# Altium PCB PCB1.PcbDoc (part 1 of 2)
Units mil, origin at the board's own origin, x right, y up, seen from the top; angles counter-clockwise.
Board outline 6000 x 4000 mil, 2 copper layers (Top Layer, Bottom Layer); 116 components, 72 nets, 335 pads, 101 vias.
Unrouted connection lines stored in the file: 3.
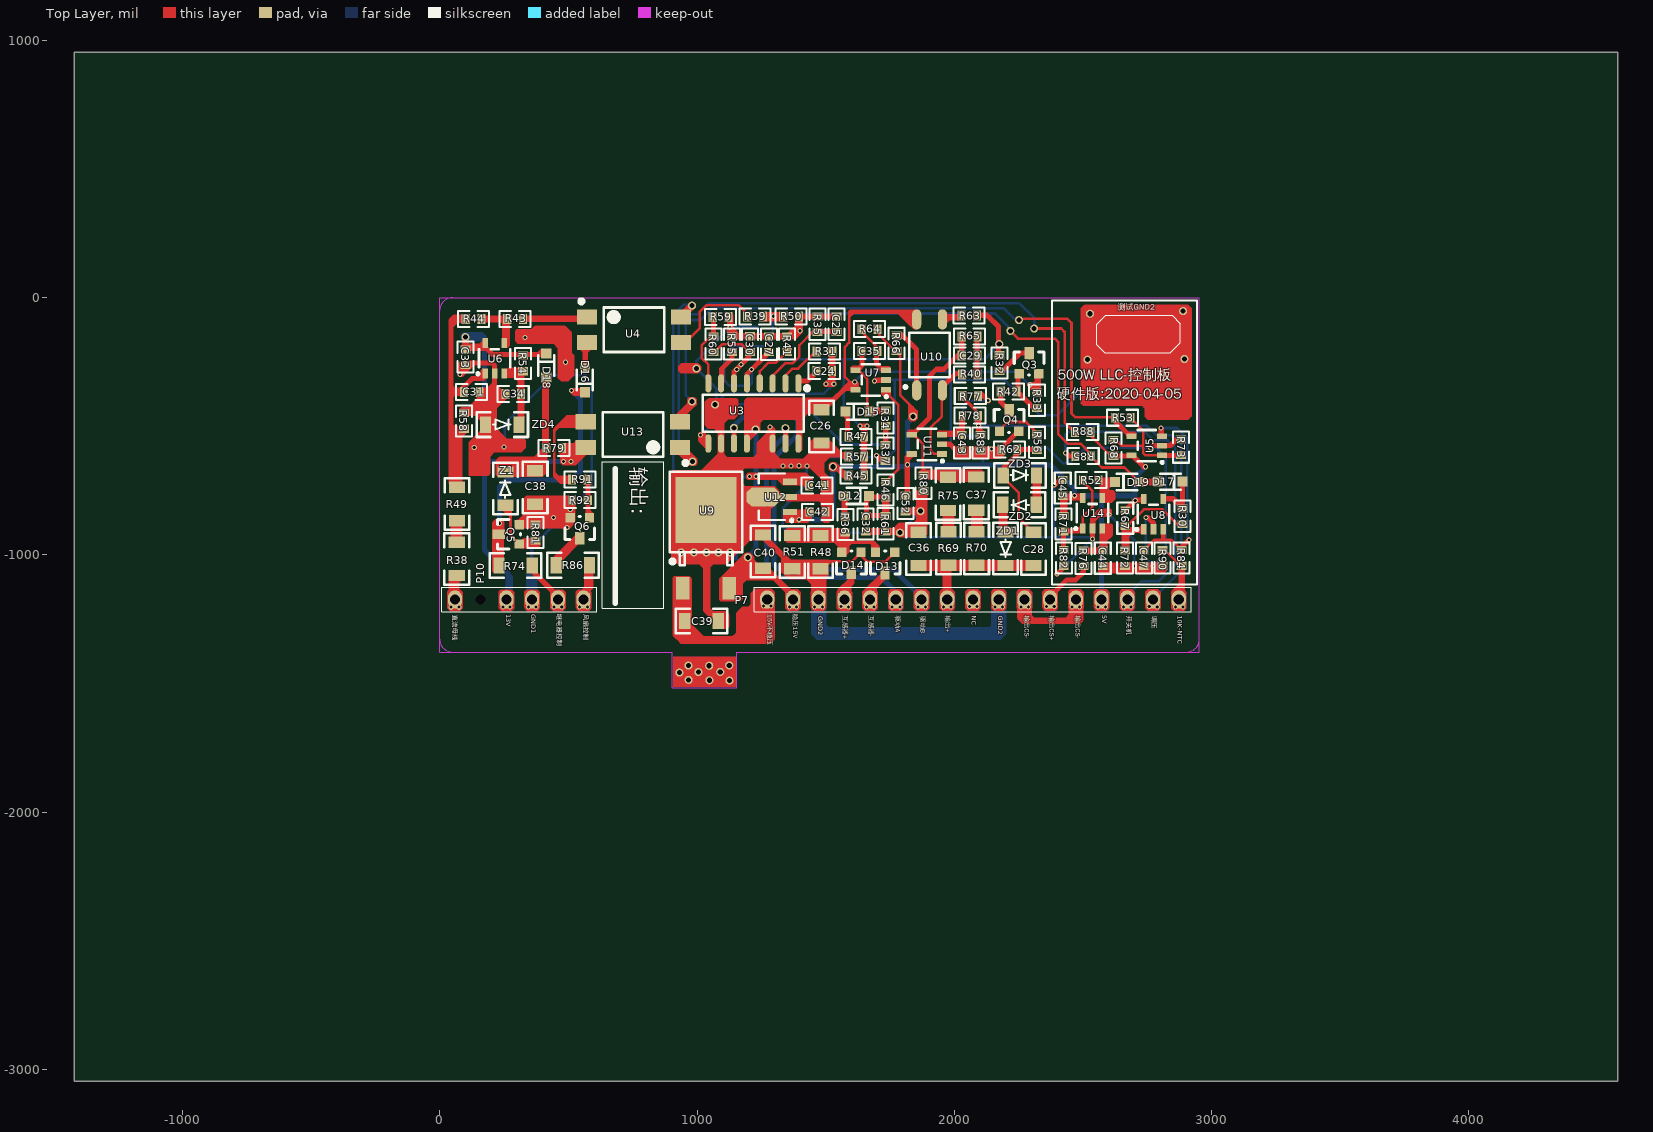
[diagram p0: Top Layer view]
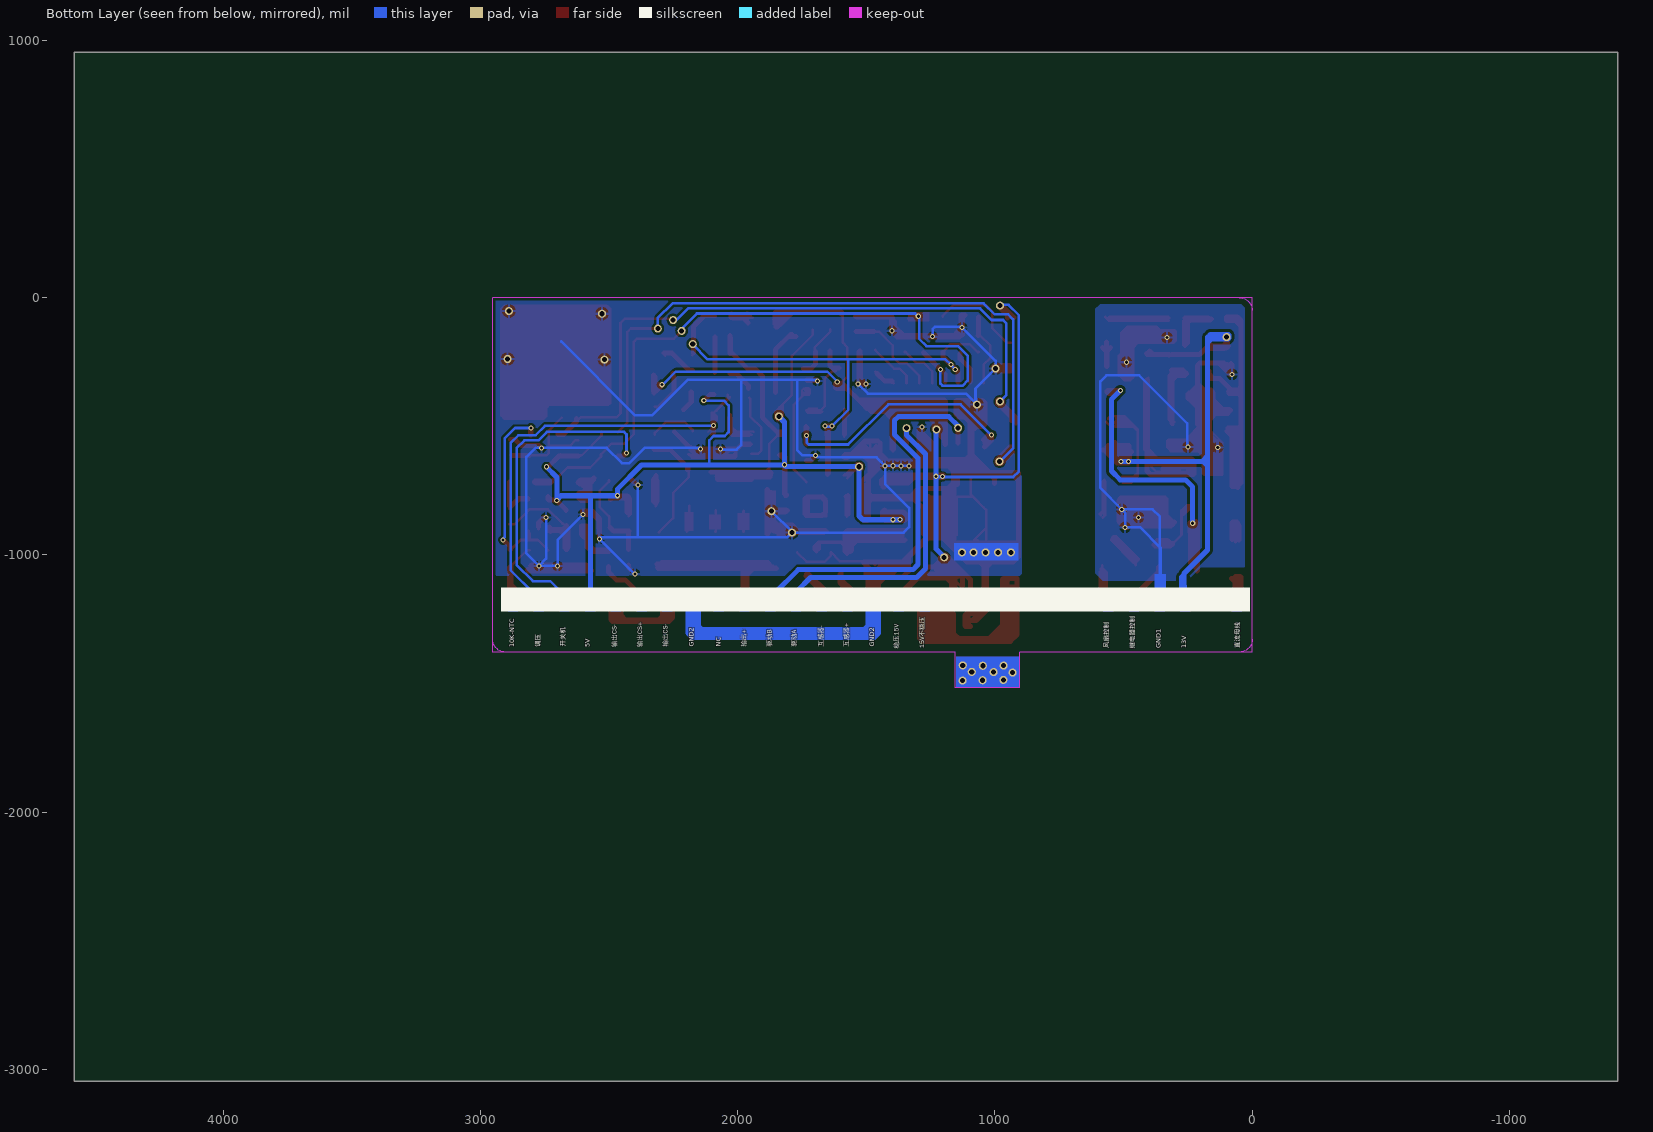
[diagram p1: Bottom Layer view, seen from below]

## Layer stack, top to bottom
Top Layer: signal copper 1.4
Dielectric: dielectric 12.6, FR-4, Dk 4.8
Bottom Layer: signal copper 1.4

## Board outline
-1420.79,-3046.26 4579.21,-3046.26 4579.21,953.74 -1420.79,953.74

## Design rules (kind name [scope] priority, off if disabled: settings)
Clearance [All] p1: gap=10
PolygonConnect [All] p1: connectstyle=Relief reliefconductorwidth=10 reliefentries=4 polygonreliefangle="90 Angle"
RoomDefinition Sheet1 [InComponentClass('Sheet1')] p1: confinementstyle=ConfineIn formatcopy=TRUE lockcomponents=FALSE outline -2420.79,-4046.26 -420.79,-4046.26 -420.79,-3046.26 -2420.79,-3046.26
RoutingVias [All] p1: holewidth=28 width=50 viastyle="Through Hole" minholewidth=28 minwidth=50 maxholewidth=28 maxwidth=50
SilkscreenOverComponentPads [All] p1: minsilkscreentomaskgap=10
SolderMaskExpansion [All] p1: expansion=4
Width [All] p1: maxlimit=10 minlimit=10 preferedwidth=10
27 further rules are at their usual default settings.

## Components (designator, comment, footprint, x,y, rotation, side; value= is the part's Value field where it differs from the comment)
C24 "105/50V/0603" 0603 1494.68,-285.83 r180 top
C25 "105/50V/0603" 0603 1541.54,-103.54 r270 top
C26 "475/50V/1206" 1206 1484.25,-500.39 r270 top
C27 "105/50V/0603" 0603 1279.13,-181.3 r270 top
C28 "223/500V/1206" 1206 2307.87,-976.57 r90 top
C29 "472/50V/0603" 0603 2059.65,-225.2 r0 top
C30 "471/50V/0603" 0603 1206.69,-180.51 r270 top
C31 "104/50V/0603" 0603 124.02,-366.34 r0 top
C32 "104/50V/0603" 0603 1655.91,-879.33 r90 top
C33 "104/50V/0603" 0603 100.79,-231.3 r270 top
C34 "104/50V/0603" 0603 285.43,-374.21 r0 top
C35 "105/50V/0603" 0603 1670.28,-208.27 r180 top
C36 "224 250V/1206" 1206 1861.42,-976.57 r90 top
C37 "NC/1206" 1206 2085.43,-762.01 r90 top
C38 "226/25V/1206" 1206 370.67,-738.19 r270 top
C39 "475/50V/1206" 1206 1017.32,-1257.48 r0 top
C40 "475/50V/1206" 1206 1256.69,-987.6 r90 top
C41 "225/25V/0603" 0603 1465.75,-729.72 r180 top
C42 "225/25V/0603" 0603 1468.5,-832.48 r180 top
C43 "104/50V/0603" 0603 2029.33,-564.57 r90 top
C44 "105/50V/0603" 0603 2577.36,-1012.99 r90 top
C45 "104/50V/0603" 0603 2421.85,-739.76 r270 top
C47 "104/50V/0603" 0603 2736.81,-1012.2 r90 top
C52 "104/50V/0603" 0603 1810.43,-800.39 r90 top
D12 "1N4148WS" 4148/323 1620.67,-770.87 r180 top
D13 "BAV99" SOT-23/BAV99 1731.5,-1030.12 r90 top
D14 "BAV99" SOT-23/BAV99 1600.39,-1029.72 r90 top
D15 "1N4148WS" 4148/323 1623.82,-443.31 r0 top
D16 "1N4148WS" 4148/323 563.98,-320.47 r90 top
D17 "1N4148WS" 4148/323 2840.35,-715.35 r180 top
D18 "1N4148WS" 4148/323 413.98,-263.78 r270 top
D19 "1N4148WS" 4148/323 2671.85,-716.93 r0 top
P7 "2.54*17" 控制主板次级排针 2072.83,-1173.03 r0 top
P10 "2.54*6" 控制主板-初级 309.06,-1173.23 r0 top
Q3 "BLM3401" SOT-23/PMOS 2291.34,-261.81 r0 top
Q4 "2N7002K" SOT-23/MOS 2213.78,-484.84 r0 top
Q5 "CJ3404" SOT-23/MOS 275,-919.29 r90 top
Q6 "CJ3404" SOT-23/MOS 543.7,-889.96 r180 top
R30 "6.8K/0603" 0603 2887.6,-850 r270 top
R31 "2.7K/0603" 0603 1495.47,-209.06 r0 top
R32 "1K/0603" 0603 2176.57,-254.33 r90 top
R33 "10K/0603" 0603 2322.24,-398.82 r270 top
R34 "2K/0603" 0603 1733.66,-468.5 r90 top
R35 "1M/0603" 0603 1468.7,-103.54 r90 top
R36 "100R/0603" 0603 1576.38,-882.09 r90 top
R37 "2K/0603" 0603 1733.27,-603.94 r270 top
R38 "150K/1206" 1206 66.14,-1015.35 r90 top
R39 "10K/0603" 0603 1225.79,-74.02 r180 top
R40 "10K/0603" 0603 2060.04,-298.03 r0 top
R41 "12K/0603" 0603 1350.39,-180.91 r90 top
R42 "10K/0603" 0603 2211.02,-364.76 r180 top
R43 "2K/0603" 0603 292.72,-82.28 r0 top
R44 "750K/0603" 0603 131.3,-82.28 r0 top
R45 "5.1K/0603" 0603 1618.7,-692.13 r0 top
R46 "2K/0603" 0603 1733.66,-747.24 r90 top
R47 "2K/0603" 0603 1618.7,-540.95 r0 top
R48 "100R 1%/1206" 1206 1479.92,-989.57 r270 top
R49 "200K/1206" 1206 66.54,-802.36 r90 top
R50 "1K/0603" 0603 1365.55,-74.02 r180 top
R51 "100R 1%/1206" 1206 1370.47,-989.57 r270 top
R52 "30K/0603" 0603 2530.91,-709.84 r180 top
R53 "6.8K/0603" 0603 2654.53,-466.93 r180 top
R54 "2K/0603" 0603 324.02,-255.71 r270 top
R55 "22K/0603" 0603 1135.43,-180.91 r90 top
R56 "2K/0603" 0603 2322.44,-562.4 r90 top
R57 "1K/0603" 0603 1619.49,-616.93 r180 top
R58 "9.1K/0603" 0603 93.7,-479.33 r270 top
R59 "10K/0603" 0603 1091.54,-75.2 r180 top
R60 "39K/0603" 0603 1063.39,-180.91 r270 top
R61 "10K/0603" 0603 1733.46,-878.94 r270 top
R62 "100K/0603" 0603 2214.17,-589.96 r180 top
R63 "1.5K/0603" 0603 2058.07,-70.08 r0 top
R64 "2K/0603" 0603 1670.67,-122.83 r180 top
R65 "300K/0603" 0603 2059.65,-151.18 r0 top
R66 "220R/0603" 0603 1775.79,-177.56 r270 top
R67 "1.5K/0603" 0603 2664.76,-857.48 r270 top
R68 "1.2K/0603" 0603 2619.88,-584.25 r90 top
R69 "9.1K/1206" 1206 1977.56,-975.39 r90 top
R70 "NC/1206" 1206 2087.01,-975 r90 top
R71 "10K/0603" 0603 2424.21,-879.53 r270 top
R72 "3.9K/0603" 0603 2663.58,-1012.6 r270 top
R73 "1K/0603" 0603 2882.09,-581.5 r90 top
R74 "1R/1206" 1206 295.08,-1041.34 r180 top
R75 "12K/1206" 1206 1975.98,-762.8 r90 top
R76 "3.3K/0603" 0603 2502.17,-1013.39 r270 top
R77 "2K/0603" 0603 2062.4,-381.89 r180 top
R78 "10K/0603" 0603 2061.22,-459.06 r180 top
R79 "100K/0603" 0603 444.29,-584.65 r180 top
R80 "3K/0603" 0603 1880.12,-721.65 r270 top
R81 "100K/0603" 0603 372.64,-913.39 r90 top
R82 "100R/0603" 0603 2425.79,-1011.81 r270 top
R83 "3K/0603" 0603 2102.56,-564.57 r90 top
R84 "3.3K/0603" 0603 2883.66,-1011.81 r270 top
R85 "1K/0603" 0603 2501.38,-616.54 r0 top
R86 "1R/1206" 1206 517.32,-1040.35 r180 top
R88 "1K/0603" 0603 2499.41,-522.05 r0 top
R90 "3.3K/0603" 0603 2809.65,-1011.81 r270 top
R91 "10K/0603" 0603 544.49,-707.28 r0 top
R92 "10K/0603" 0603 544.88,-787.6 r180 top
U3 "NCP1396A" SOP16 1218.9,-450.2 r180 top
U4 "EL817S1(A)(TU)-F" EL817A 754.33,-141.54 r180 top
U5 "LM321-TR" SOT23-5 2748.23,-575.59 r90 top
U6 "LM321-TR" SOT23-5 213.39,-235.83 r0 top
U7 "LM321-TR" SOT23-5 1675.79,-320.08 r90 top
U8 "LM321-TR" SOT23-5 2774.61,-841.34 r0 top
U9 "CJ7815_C139827" to-252 1034.65,-977.56 r270 top
U10 "EL357N(A)(TA)-G" EL357 1904.13,-222.44 r90 top
U11 "GS8051-TR" SOT23-5 1893.9,-570.47 r90 top
U12 "CJ78L05" CJ78J05 1278.74,-775 r0 top
U13 "EL817S1(A)(TU)-F" EL817A 751.57,-515.95 r0 top
U14 "LM321-TR" SOT23-5 2537.6,-837.8 r0 top
Z1 "5.1V" SOD-123 255.31,-742.13 r90 top
ZD1 "5.1V" SOD-123 2198.82,-975.79 r270 top
ZD2 "11V" SOD-123 2253.74,-805.12 r180 top
ZD3 "11V" SOD-123 2255.31,-691.34 r0 top
ZD4 "5.1V" SOD-123 242.91,-493.9 r0 top

## Footprints (in the part's own frame and the unit in brackets; to place one, negate y for a bottom-side part, rotate by r counter-clockwise, add the part's x,y. Pads: shape width x height; smd on the part's side, far side on the other; paste and mask are expansions set on the pad)
0603 [mm]
  rect 0.8x0.98 smd: 1(0.77,0) 2(-0.77,0)
  silkscreen extent -1.53,-0.79 1.54,0.79
1206 [mil]
  rect 44x63 smd: 1(-65,0) 2(65,0)
  silkscreen extent -100,-48 100,48
4148/323 [mm]
  rect 1x1 smd: 1(-1.2,0) 2(1.2,0)
  silkscreen extent -1,-0.8 1,0.8
CJ78J05 [mm]
  rect 1.4x0.6 smd: 1(2.116,-1.495) 3(2.116,1.505)
  oct 3.2x1.9 smd: 2(-0.584,0.005)
  rect 1.8x0.6 smd: 2(1.916,0.005)
  silkscreen extent -0.98,-2.47 2.39,2.3
EL357 [mm]
  oval 2x0.9 smd: 1(-3.5,1.27) 2(-3.5,-1.27) 3(3.5,-1.27) 4(3.5,1.27)
  silkscreen extent -3.32,-2 2.2,2.54
EL817A [mm]
  rect 2x1.5 smd: 1(4.633,-1.693) 2(4.633,0.847) 3(-4.667,0.847) 4(-4.667,-1.693)
  silkscreen extent -3.02,-3.42 5.38,1.78
SOD-123 [mm]
  rect 1.1x1.6 smd: 1(-1.65,0) 2(1.65,0)
  silkscreen extent -2.54,-1.22 2.54,1.22
SOP16 [mil]
  oval 23.62x70.79 smd: 1(-175,-117) 2(-125,-117) 3(-75,-117) 4(-25,-117) 5(25,-117) 6(75,-117) 7(125,-117) 8(175,-117) 9(175,117) 10(125,117) 11(75,117) 12(25,117) 14(-75,117) 15(-125,117) 16(-175,117)
  silkscreen extent -217,-106 196,72
SOT23-5 [mm]
  rect 0.55x1 smd: 1(-0.95,-1.5) 2(0,-1.5) 3(0.95,-1.5) 4(0.95,1.5) 5(-0.95,1.5)
  silkscreen extent -1.78,-1.65 1.55,0.9
SOT-23/BAV99 [mil]
  rect 36x36 smd: 1(40,-37.5) 2(40,37.5)
  rect 50x36 smd: 3(-40,0.5)
  silkscreen extent -45,-57 45,58
SOT-23/MOS [mil]
  rect 36x50 smd: D(-0.19,45.63)
  rect 36x36 smd: G(-38.19,-34.37) S(36.81,-34.37)
  silkscreen extent -58,-39 57,51
SOT-23/PMOS [mil]
  rect 36x50 smd: 1(-0.19,45.63)
  rect 36x36 smd: 2(-38.19,-34.37) 3(36.81,-34.37)
  silkscreen extent -58,-39 57,51
to-252 [mm]
  rect 2.2x1.35 smd: 1(3.876,-2.29) 3(3.871,2.29)
  rect 6.5x6 smd: 4(-3.876,0)
  silkscreen extent -7.64,-3.57 1.61,3.57
控制主板-初级 [mm]
  oval 1.4x1.8 hole 1: 1(-6.35,0) 3(-1.27,0) 4(1.27,0) 5(3.81,0) 6(6.35,0)
  round 0 hole 1: 2(-3.81,0)
  Top Layer lines w0.5: -6.87,-0.55 -6.87,-0.8 -6.75,-0.92 -5.93,-0.92 -5.82,-0.81 -5.82,0.63 -5.94,0.75 -6.81,0.75 -6.88,0.68 -6.88,-0.71 -6.75,-0.84 -6.31,-0.84 -6.19,-0.72 -6.24,-0.72 -6.15,-0.63 -6.15,-0.28 ; -1.79,-0.55 -1.79,-0.8 -1.67,-0.92 -0.85,-0.92 -0.74,-0.81 -0.74,0.63 -0.86,0.75 -1.73,0.75 -1.8,0.68 -1.8,-0.71 -1.67,-0.84 -1.23,-0.84 -1.11,-0.72 -1.16,-0.72 -1.07,-0.63 -1.07,-0.28 ; 0.75,-0.55 0.75,-0.8 0.87,-0.92 1.69,-0.92 1.8,-0.81 1.8,0.63 1.68,0.75 0.81,0.75 0.74,0.68 0.74,-0.71 0.87,-0.84 1.31,-0.84 1.43,-0.72 1.38,-0.72 1.47,-0.63 1.47,-0.28 ; 3.29,-0.55 3.29,-0.8 3.41,-0.92 4.23,-0.92 4.34,-0.81 4.34,0.63 4.22,0.75 3.35,0.75 3.28,0.68 3.28,-0.71 3.41,-0.84 3.85,-0.84 3.97,-0.72 3.92,-0.72 4.01,-0.63 4.01,-0.28 ; 5.83,-0.55 5.83,-0.8 5.95,-0.92 6.77,-0.92 6.88,-0.81 6.88,0.63 6.76,0.75 5.89,0.75 5.82,0.68 5.82,-0.71 5.95,-0.84 6.39,-0.84 6.51,-0.72 6.46,-0.72 6.55,-0.63 6.55,-0.28
  Bottom Layer lines w0.5: -6.86,-0.56 -6.86,-0.81 -6.74,-0.93 -5.92,-0.93 -5.81,-0.82 -5.81,0.62 -5.93,0.74 -6.8,0.74 -6.87,0.67 -6.87,-0.72 -6.74,-0.85 -6.3,-0.85 -6.18,-0.73 -6.23,-0.73 -6.14,-0.64 -6.14,-0.29 ; -1.78,-0.56 -1.78,-0.81 -1.66,-0.93 -0.84,-0.93 -0.73,-0.82 -0.73,0.62 -0.85,0.74 -1.72,0.74 -1.79,0.67 -1.79,-0.72 -1.66,-0.85 -1.22,-0.85 -1.1,-0.73 -1.15,-0.73 -1.06,-0.64 -1.06,-0.29 ; 0.76,-0.56 0.76,-0.81 0.88,-0.93 1.7,-0.93 1.81,-0.82 1.81,0.62 1.69,0.74 0.82,0.74 0.75,0.67 0.75,-0.72 0.88,-0.85 1.32,-0.85 1.44,-0.73 1.39,-0.73 1.48,-0.64 1.48,-0.29 ; 3.3,-0.56 3.3,-0.81 3.42,-0.93 4.24,-0.93 4.35,-0.82 4.35,0.62 4.23,0.74 3.36,0.74 3.29,0.67 3.29,-0.72 3.42,-0.85 3.86,-0.85 3.98,-0.73 3.93,-0.73 4.02,-0.64 4.02,-0.29 ; 5.84,-0.56 5.84,-0.81 5.96,-0.93 6.78,-0.93 6.89,-0.82 6.89,0.62 6.77,0.74 5.9,0.74 5.83,0.67 5.83,-0.72 5.96,-0.85 6.4,-0.85 6.52,-0.73 6.47,-0.73 6.56,-0.64 6.56,-0.29
  silkscreen extent -7.65,-1.2 7.65,1.2
控制主板次级排针 [mm]
  oval 1.4x1.8 hole 1: 11(-20.32,0) 12(-17.78,0) 13(-15.24,0) 14(-12.7,0) 15(-10.16,0) 16(-7.62,0) 17(-5.08,0) 18(-2.54,0) 19(0,0) 20(2.54,0) 21(5.08,0) 22(7.62,0) 23(10.16,0) 24(12.7,0) 25(15.24,0) 26(17.78,0) 27(20.32,0)
  Top Layer lines w0.5: -20.84,-0.55 -20.84,-0.8 -20.72,-0.92 -19.9,-0.92 -19.79,-0.81 -19.79,0.63 -19.91,0.75 -20.78,0.75 -20.85,0.68 -20.85,-0.71 -20.72,-0.84 -20.28,-0.84 -20.16,-0.72 -20.21,-0.72 -20.12,-0.63 -20.12,-0.28 ; -18.3,-0.55 -18.3,-0.8 -18.18,-0.92 -17.36,-0.92 -17.25,-0.81 -17.25,0.63 -17.37,0.75 -18.24,0.75 -18.31,0.68 -18.31,-0.71 -18.18,-0.84 -17.74,-0.84 -17.62,-0.72 -17.67,-0.72 -17.58,-0.63 -17.58,-0.28 ; -15.76,-0.55 -15.76,-0.8 -15.64,-0.92 -14.82,-0.92 -14.71,-0.81 -14.71,0.63 -14.83,0.75 -15.7,0.75 -15.77,0.68 -15.77,-0.71 -15.64,-0.84 -15.2,-0.84 -15.08,-0.72 -15.13,-0.72 -15.04,-0.63 -15.04,-0.28 ; -13.22,-0.55 -13.22,-0.8 -13.1,-0.92 -12.28,-0.92 -12.17,-0.81 -12.17,0.63 -12.29,0.75 -13.16,0.75 -13.23,0.68 -13.23,-0.71 -13.1,-0.84 -12.66,-0.84 -12.54,-0.72 -12.59,-0.72 -12.5,-0.63 -12.5,-0.28 ; -10.68,-0.55 -10.68,-0.8 -10.56,-0.92 -9.74,-0.92 -9.63,-0.81 -9.63,0.63 -9.75,0.75 -10.62,0.75 -10.69,0.68 -10.69,-0.71 -10.56,-0.84 -10.12,-0.84 -10,-0.72 -10.05,-0.72 -9.96,-0.63 -9.96,-0.28 ; -8.14,-0.55 -8.14,-0.8 -8.02,-0.92 -7.2,-0.92 -7.09,-0.81 -7.09,0.63 -7.21,0.75 -8.08,0.75 -8.15,0.68 -8.15,-0.71 -8.02,-0.84 -7.58,-0.84 -7.46,-0.72 -7.51,-0.72 -7.42,-0.63 -7.42,-0.28 ; -5.6,-0.55 -5.6,-0.8 -5.48,-0.92 -4.66,-0.92 -4.55,-0.81 -4.55,0.63 -4.67,0.75 -5.54,0.75 -5.61,0.68 -5.61,-0.71 -5.48,-0.84 -5.04,-0.84 -4.92,-0.72 -4.97,-0.72 -4.88,-0.63 -4.88,-0.28 ; -3.06,-0.55 -3.06,-0.8 -2.94,-0.92 -2.12,-0.92 -2.01,-0.81 -2.01,0.63 -2.13,0.75 -3,0.75 -3.07,0.68 -3.07,-0.71 -2.94,-0.84 -2.5,-0.84 -2.38,-0.72 -2.43,-0.72 -2.34,-0.63 -2.34,-0.28 ; -0.52,-0.55 -0.52,-0.8 -0.4,-0.92 0.42,-0.92 0.53,-0.81 0.53,0.63 0.41,0.75 -0.46,0.75 -0.53,0.68 -0.53,-0.71 -0.4,-0.84 0.04,-0.84 0.16,-0.72 0.11,-0.72 0.2,-0.63 0.2,-0.28 ; 2.02,-0.55 2.02,-0.8 2.14,-0.92 2.96,-0.92 3.07,-0.81 3.07,0.63 2.95,0.75 2.08,0.75 2.01,0.68 2.01,-0.71 2.14,-0.84 2.58,-0.84 2.7,-0.72 2.65,-0.72 2.74,-0.63 2.74,-0.28 ; 4.56,-0.55 4.56,-0.8 4.68,-0.92 5.5,-0.92 5.61,-0.81 5.61,0.63 5.49,0.75 4.62,0.75 4.55,0.68 4.55,-0.71 4.68,-0.84 5.12,-0.84 5.24,-0.72 5.19,-0.72 5.28,-0.63 5.28,-0.28 ; 7.1,-0.55 7.1,-0.8 7.22,-0.92 8.04,-0.92 8.15,-0.81 8.15,0.63 8.03,0.75 7.16,0.75 7.09,0.68 7.09,-0.71 7.22,-0.84 7.66,-0.84 7.78,-0.72 7.73,-0.72 7.82,-0.63 7.82,-0.28 ; 9.64,-0.55 9.64,-0.8 9.76,-0.92 10.58,-0.92 10.69,-0.81 10.69,0.63 10.57,0.75 9.7,0.75 9.63,0.68 9.63,-0.71 9.76,-0.84 10.2,-0.84 10.32,-0.72 10.27,-0.72 10.36,-0.63 10.36,-0.28 ; 12.18,-0.55 12.18,-0.8 12.3,-0.92 13.12,-0.92 13.23,-0.81 13.23,0.63 13.11,0.75 12.24,0.75 12.17,0.68 12.17,-0.71 12.3,-0.84 12.74,-0.84 12.86,-0.72 12.81,-0.72 12.9,-0.63 12.9,-0.28 ; 17.26,-0.55 17.26,-0.8 17.38,-0.92 18.2,-0.92 18.31,-0.81 18.31,0.63 18.19,0.75 17.32,0.75 17.25,0.68 17.25,-0.71 17.38,-0.84 17.82,-0.84 17.94,-0.72 17.89,-0.72 17.98,-0.63 17.98,-0.28 ; 19.8,-0.55 19.8,-0.8 19.92,-0.92 20.74,-0.92 20.85,-0.81 20.85,0.63 20.73,0.75 19.86,0.75 19.79,0.68 19.79,-0.71 19.92,-0.84 20.36,-0.84 20.48,-0.72 20.43,-0.72 20.52,-0.63 20.52,-0.28 ; 14.71,-0.71 14.71,0.68 ; 14.71,-0.71 14.84,-0.84 ; 14.71,-0.71 14.84,-0.84 ; 14.71,-0.71 14.71,0.68 ; 14.71,0.68 14.78,0.75 ; 14.71,0.68 14.78,0.75 ; 14.72,-0.8 14.72,-0.55 14.72,-0.8 ; 14.72,-0.8 14.84,-0.92 ; 14.72,-0.8 14.84,-0.92 ; 14.78,0.75 15.65,0.75 ; 14.78,0.75 15.65,0.75 ; 14.84,-0.92 15.66,-0.92 ; 14.84,-0.92 15.66,-0.92 ; 14.84,-0.84 15.28,-0.84 ; 14.84,-0.84 15.28,-0.84 ; 15.28,-0.84 15.4,-0.72 ; 15.28,-0.84 15.4,-0.72 ; 15.35,-0.72 15.4,-0.72 ; 15.35,-0.72 15.44,-0.63 ; 15.35,-0.72 15.44,-0.63 ; 15.35,-0.72 15.4,-0.72 ; 15.44,-0.63 15.44,-0.28 15.44,-0.63 ; 15.65,0.75 15.77,0.63 ; 15.65,0.75 15.77,0.63 ; 15.66,-0.92 15.77,-0.81 ; 15.66,-0.92 15.77,-0.81 ; 15.77,-0.81 15.77,0.63 ; 15.77,-0.81 15.77,0.63
  Bottom Layer lines w0.5: -20.83,-0.56 -20.83,-0.81 -20.71,-0.93 -19.89,-0.93 -19.78,-0.82 -19.78,0.62 -19.9,0.74 -20.77,0.74 -20.84,0.67 -20.84,-0.72 -20.71,-0.85 -20.27,-0.85 -20.15,-0.73 -20.2,-0.73 -20.11,-0.64 -20.11,-0.29 ; -18.29,-0.56 -18.29,-0.81 -18.17,-0.93 -17.35,-0.93 -17.24,-0.82 -17.24,0.62 -17.36,0.74 -18.23,0.74 -18.3,0.67 -18.3,-0.72 -18.17,-0.85 -17.73,-0.85 -17.61,-0.73 -17.66,-0.73 -17.57,-0.64 -17.57,-0.29 ; -15.75,-0.56 -15.75,-0.81 -15.63,-0.93 -14.81,-0.93 -14.7,-0.82 -14.7,0.62 -14.82,0.74 -15.69,0.74 -15.76,0.67 -15.76,-0.72 -15.63,-0.85 -15.19,-0.85 -15.07,-0.73 -15.12,-0.73 -15.03,-0.64 -15.03,-0.29 ; -13.21,-0.56 -13.21,-0.81 -13.09,-0.93 -12.27,-0.93 -12.16,-0.82 -12.16,0.62 -12.28,0.74 -13.15,0.74 -13.22,0.67 -13.22,-0.72 -13.09,-0.85 -12.65,-0.85 -12.53,-0.73 -12.58,-0.73 -12.49,-0.64 -12.49,-0.29 ; -10.67,-0.56 -10.67,-0.81 -10.55,-0.93 -9.73,-0.93 -9.62,-0.82 -9.62,0.62 -9.74,0.74 -10.61,0.74 -10.68,0.67 -10.68,-0.72 -10.55,-0.85 -10.11,-0.85 -9.99,-0.73 -10.04,-0.73 -9.95,-0.64 -9.95,-0.29 ; -8.13,-0.56 -8.13,-0.81 -8.01,-0.93 -7.19,-0.93 -7.08,-0.82 -7.08,0.62 -7.2,0.74 -8.07,0.74 -8.14,0.67 -8.14,-0.72 -8.01,-0.85 -7.57,-0.85 -7.45,-0.73 -7.5,-0.73 -7.41,-0.64 -7.41,-0.29 ; -5.59,-0.56 -5.59,-0.81 -5.47,-0.93 -4.65,-0.93 -4.54,-0.82 -4.54,0.62 -4.66,0.74 -5.53,0.74 -5.6,0.67 -5.6,-0.72 -5.47,-0.85 -5.03,-0.85 -4.91,-0.73 -4.96,-0.73 -4.87,-0.64 -4.87,-0.29 ; -3.05,-0.56 -3.05,-0.81 -2.93,-0.93 -2.11,-0.93 -2,-0.82 -2,0.62 -2.12,0.74 -2.99,0.74 -3.06,0.67 -3.06,-0.72 -2.93,-0.85 -2.49,-0.85 -2.37,-0.73 -2.42,-0.73 -2.33,-0.64 -2.33,-0.29 ; -0.51,-0.56 -0.51,-0.81 -0.39,-0.93 0.43,-0.93 0.54,-0.82 0.54,0.62 0.42,0.74 -0.45,0.74 -0.52,0.67 -0.52,-0.72 -0.39,-0.85 0.05,-0.85 0.17,-0.73 0.12,-0.73 0.21,-0.64 0.21,-0.29 ; 2.03,-0.56 2.03,-0.81 2.15,-0.93 2.97,-0.93 3.08,-0.82 3.08,0.62 2.96,0.74 2.09,0.74 2.02,0.67 2.02,-0.72 2.15,-0.85 2.59,-0.85 2.71,-0.73 2.66,-0.73 2.75,-0.64 2.75,-0.29 ; 4.57,-0.56 4.57,-0.81 4.69,-0.93 5.51,-0.93 5.62,-0.82 5.62,0.62 5.5,0.74 4.63,0.74 4.56,0.67 4.56,-0.72 4.69,-0.85 5.13,-0.85 5.25,-0.73 5.2,-0.73 5.29,-0.64 5.29,-0.29 ; 7.11,-0.56 7.11,-0.81 7.23,-0.93 8.05,-0.93 8.16,-0.82 8.16,0.62 8.04,0.74 7.17,0.74 7.1,0.67 7.1,-0.72 7.23,-0.85 7.67,-0.85 7.79,-0.73 7.74,-0.73 7.83,-0.64 7.83,-0.29 ; 9.65,-0.56 9.65,-0.81 9.77,-0.93 10.59,-0.93 10.7,-0.82 10.7,0.62 10.58,0.74 9.71,0.74 9.64,0.67 9.64,-0.72 9.77,-0.85 10.21,-0.85 10.33,-0.73 10.28,-0.73 10.37,-0.64 10.37,-0.29 ; 12.19,-0.56 12.19,-0.81 12.31,-0.93 13.13,-0.93 13.24,-0.82 13.24,0.62 13.12,0.74 12.25,0.74 12.18,0.67 12.18,-0.72 12.31,-0.85 12.75,-0.85 12.87,-0.73 12.82,-0.73 12.91,-0.64 12.91,-0.29 ; 15.635,0.765 15.78,0.62 ; 17.27,-0.56 17.27,-0.81 17.39,-0.93 18.21,-0.93 18.32,-0.82 18.32,0.62 18.2,0.74 17.33,0.74 17.26,0.67 17.26,-0.72 17.39,-0.85 17.83,-0.85 17.95,-0.73 17.9,-0.73 17.99,-0.64 17.99,-0.29 ; 19.81,-0.56 19.81,-0.81 19.93,-0.93 20.75,-0.93 20.86,-0.82 20.86,0.62 20.74,0.74 19.87,0.74 19.8,0.67 19.8,-0.72 19.93,-0.85 20.37,-0.85 20.49,-0.73 20.44,-0.73 20.53,-0.64 20.53,-0.29 ; 14.72,-0.72 14.72,0.67 ; 14.72,-0.72 14.85,-0.85 ; 14.72,-0.72 14.85,-0.85 ; 14.72,-0.72 14.72,0.67 ; 14.72,0.67 14.79,0.74 ; 14.72,0.67 14.79,0.74 ; 14.73,-0.81 14.73,-0.56 14.73,-0.81 ; 14.73,-0.81 14.85,-0.93 ; 14.73,-0.81 14.85,-0.93 ; 14.79,0.74 15.66,0.74 ; 14.79,0.74 15.66,0.74 ; 14.85,-0.93 15.67,-0.93 ; 14.85,-0.93 15.67,-0.93 ; 14.85,-0.85 15.29,-0.85 ; 14.85,-0.85 15.29,-0.85 ; 15.29,-0.85 15.41,-0.73 ; 15.29,-0.85 15.41,-0.73 ; 15.36,-0.73 15.41,-0.73 ; 15.36,-0.73 15.45,-0.64 ; 15.36,-0.73 15.45,-0.64 ; 15.36,-0.73 15.41,-0.73 ; 15.45,-0.64 15.45,-0.29 15.45,-0.64 ; 15.66,0.74 15.78,0.62 ; 15.67,-0.93 15.78,-0.82 ; 15.67,-0.93 15.78,-0.82 ; 15.78,-0.82 15.78,0.62 ; 15.78,-0.82 15.78,0.62
  silkscreen extent -21.62,-1.2 21.53,1.2

## Part data
C24 C25 C26 C27 C28 C29 C30 C31 C32 C33 C34 C35 C36 C37 C38 C39 C40 C41 C42 C43 C44 C45 C47 C52: library part CAP, "Capacitor"
D12 D15 D16 D17 D18 D19: library part 1N4148WS-C99332
D13 D14: library part BAV99_C109206
P7: library part Component_2
P10: library part "Header 6", "Header, 6-Pin"
Q3: library part MOSFET-P, "P-Channel MOSFET"
Q4 Q5 Q6: library part "MOSFET N"
R30 R31 R32 R33 R34 R35 R36 R37 R38 R39 R40 R41 R42 R43 R44 R45 R46 R47 R48 R49 R50 R51 R52 R53 R54 R55 R56 R57 R58 R59 R60 R61 R62 R63 R64 R65 R66 R67 R68 R69 R70 R71 R72 R73 R74 R75 R76 R77 R78 R79 R80 R81 R82 R83 R84 R85 R86 R88 R90 R91 R92: library part RES2
U3: library part Component_1
U4 U13: library part Optoisolator1, "4-Pin Phototransistor Optocoupler"
Z1 ZD1 ZD2 ZD3 ZD4: library part "DIODE TUNNEL", "Diode Tunnel"

## Free pads (board coordinates)
  round 31.5 hole 19.68: 2(1070.28,-416.14) 2(1840.35,-461.42) 3(980.91,-404.33) 4(2310.83,-120.08) 5(2251.38,-87.01) 6(2217.91,-129.13) 7(2527.76,-62.6) 8(2518.31,-241.34) 9(2889.96,-52.36) 10(2894.68,-238.58) 14(99.41,-153.54) 15(1343.9,-507.48) 16(1143.11,-506.3) 17(982.48,-637.01) 20(997.44,-275.59) 21(980.51,-31.1) 22(1197.44,-1009.45) 25(1789.17,-913.78) 27(1528.54,-657.48) 30(2175,-180.71) 35(1227.76,-512.2) 38(1868.9,-830.32) 40(1128.54,-990.16) 41(1083.27,-990.16) 42(1036.42,-990.16) 43(987.99,-990.16) 44(937.99,-990.55) 45(1126.18,-1488.98) 46(1125.39,-1429.53) 47(1090.35,-1455.12) 48(1048.23,-1487.4) 49(1047.44,-1431.1) 50(1005.32,-1455.91) 51(967.52,-1486.22) 52(966.34,-1430.71) 53(931.69,-1457.48)
  round 118.11 on Top Solder: 11(2623.03,-142.13) 11(2806.89,-140.55)

## Via types
v1: diameter 19.68, hole 11.81, Top Layer to Bottom Layer, 101 vias

## Nets (pads, with @x,y where several pads share a name; then routed paths per layer and width w, separated by ;. In a path a pad name is that pad's centre, name@x,y a point inside that pad or via, vN(x,y) a via of type N, cw(c..) or ccw(c..) an arc to the next point about the centre after c; other vN are vias at no path point)
5V: C42.1 C45.1 C52.1 P7.24 pad.2@1840.35,-461.42 pad.27 R45.2 R64.2 R66.1 R67.2 R68.2 R71.2 R77.2 R88.1 U5.5 U8.5 U11.5 U12.1 U14.5 | length 4609.9
  Top Layer w10: v1(1396.65,-863.39) 1369.88,-863.39 1362.06,-855.56 U12.1@1362.06,-833.88 1436.79,-833.88 C42.1@1438.19,-832.48 ; pad.27@1528.54,-657.48 1537.07,-657.48 1569.35,-689.76 R45.2@1587.99,-689.76 ; R64.2@1708.46,-124.41 1708.46,-144.88 1789.57,-225.98 1789.57,-378.35 1837.6,-426.38 pad.2@1837.6,-460.63 ; C52.1@1817.13,-773.23 1817.13,-618.5 1828.54,-607.09 U11.5@1827.76,-606.3 ; R77.2@2092.72,-381.89 2113.58,-381.89 v1(2132.09,-400.39) ; R71.2@2424.21,-849.21 2421.85,-846.85 C45.1@2421.85,-770.08 2491.53,-770.08 U14.5@2500.2,-778.74 ; R88.1@2529.72,-522.05 2529.72,-536.22 2606.5,-612.99 U5.5@2689.17,-612.99 2733.66,-657.48 v1@2746.26,-657.48 ; R67.2@2664.76,-827.17 2704.13,-787.8 U8.5@2737.99,-787.8 ; U5.5@2689.17,-616.93 U5.5@2689.17,-609.84
  Bottom Layer w10: v1(1369.49,-862.99) 1515.55,-862.99 1528.54,-850 pad.27@1528.54,-657.48 ; 1776.57,-657.48 pad.27@1528.54,-657.48 ; v1@1817.52,-657.48 pad.27@1528.54,-657.48 ; v1(1817.52,-649.61) 1851.38,-649.61 1854.13,-652.36 2373.03,-652.36 2467.91,-747.24 v1@2467.91,-767.72 ; 1817.52,-637.01 1817.52,-485.43 pad.2@1838.39,-464.57 ; v1@1821.46,-657.48 pad.27@1528.54,-657.48 ; 2110.83,-649.61 2110.83,-554.72 2093.9,-537.8 2050.59,-537.8 2035.24,-522.44 2035.24,-419.29 2054.13,-400.39 v1(2132.09,-400.39) ; v1(2468.31,-770.08) 2684.84,-770.08 v1(2703.74,-788.98) 2703.74,-696.85 v1(2743.11,-657.48) v1@2743.11,-658.66 ; P7.24@2572.64,-1161.42 2572.64,-772.05
  other v1: 2587.2,-1203.15 2558.46,-1201.97
13V: C33.2 D18.1 P10.3 pad.14 R54.2 R79.2 U6.5 U13.4 | length 2205.6
  Top Layer w10: pad.14@99.02,-157.87 100.79,-159.65 C33.2@100.79,-200.98 151.77,-200.98 U6.5@175.98,-176.77 175.98,-195.47 202.17,-221.65 R54.2@320.28,-221.65 ; R54.2@335.51,-225.39 344.37,-216.54 D18.1@413.98,-216.54 ; R79.2@474.61,-584.65 R79.2@476.65,-582.6 ; R79.2@476.65,-582.6 480.51,-586.46 v1(480.51,-636.61) v1(510.04,-636.61) 564.05,-582.6 U13.4@567.83,-582.6 R79.2@476.65,-582.6
  Bottom Layer w10: pad.14@99.41,-153.54 pad.14@99.8,-153.94 ; pad.14@105.31,-151.18 176.18,-151.18 172.24,-155.12 172.24,-977.17 279.33,-1084.25 279.33,-1152.95 P10.3@259.06,-1173.23 259.06,-1121.06 278.94,-1101.18 ; 174.21,-636.61 v1@507.28,-636.61
  other v1: 245.47,-1202.36 273.82,-1201.97
15V-3: C26.1 C40.1 C41.1 P7.12 pad.21 pad.22 pad.35 Q3.3 R33.2 U3.12 U3.16 U4.4 U7.5 U9.3 U10.4 U12.3 | length 4525.3
  Top Layer w10: U4.4@938.07,-74.88 984.61,-28.35 pad.21@985.63,-28.35 ; pad.22@1197.44,-1009.45 1124.8,-1082.09 U9.3@1124.8,-1129.96 1202.16,-1052.6 C40.1@1264.21,-1052.6 ; v1@1199.8,-694.88 1308.07,-694.88 1328.95,-715.76 U12.3@1362.06,-715.76 1421.08,-715.76 1435.04,-729.72 C41.1@1435.43,-729.72 ; pad.35@1227.76,-512.2 1193.9,-546.06 U3.12@1193.9,-567.2 1193.9,-487.4 1214.76,-466.54 1386.02,-466.54 1394.49,-475 ; C40.1@1259.88,-1052.6 1372.83,-1165.55 P7.12@1372.83,-1173.03 P7.12@1372.83,-1161.22 ; U3.16@1393.9,-567.2 1393.9,-475.59 1434.09,-435.39 C26.1@1484.25,-435.39 1492.76,-435.39 1570.47,-357.68 1613.39,-357.68 1613.39,-328.54 v1(1613.19,-328.35) ; U7.5@1616.73,-357.87 1616.73,-351.18 1574.61,-309.06 1574.61,-192.13 1591.54,-175.2 1591.54,-75.59 1608.07,-59.06 1822.24,-59.06 U10.4@1841.34,-78.15 ; v1@2295.08,-337.01 2320.87,-362.8 2322.44,-362.8 2322.44,-301.89 Q3.3@2328.15,-296.18
  Bottom Layer w10: pad.21@985.63,-28.35 947.44,-28.35 907.28,-68.5 907.28,-675.2 929.33,-697.24 v1@1222.24,-697.24 ; pad.22@1197.44,-1009.45 1227.76,-979.13 pad.35@1227.76,-512.2 ; v1@1202.95,-694.88 v1@1228.15,-694.88 ; v1(1613.19,-328.35) 1613.19,-326.77 1651.77,-288.19 2241.54,-288.19 2289.57,-336.22 v1@2293.11,-336.22
  other v1: 1359.25,-1202.36 1387.6,-1202.76 1203.35,-695.28 1228.94,-694.49 2293.9,-338.58
400V-1: P10.1 R38.1 | length 95.8
  Top Layer w10: P10.1@59.06,-1173.23 59.06,-1087.44 R38.1@66.14,-1080.35
  other v1: 43.9,-1203.54 74.61,-1203.54
CI-15V: C39.1 P7.11 U9.1 | length 598.7
  Top Layer w10: U9.1@944.49,-1130.16 944.49,-1249.65 1028.7,-1333.86 1196.26,-1333.86 1272.83,-1257.28 P7.11@1272.83,-1173.03
  other v1: 1259.25,-1199.61 1287.99,-1199.61
CJ-BO: C27.1 D17.2 D19.2 pad.6 R39.2 R50.1 R85.1 U3.5 | length 2841
  Top Layer w10: U3.5@1193.9,-333.2 1193.9,-299.21 1279.13,-213.98 C27.1@1279.13,-211.61 ; pad.6@2217.91,-129.13 2247.83,-159.06 2391.14,-159.06 2403.74,-171.65 2403.74,-530.32 2441.14,-567.72 2490.35,-567.72 2531.69,-609.06 2531.69,-618.5 2573.42,-660.24 2662.01,-660.24 2708.46,-706.69 D19.2@2716.73,-706.69 ; D19.2@2719.09,-716.93 2720.67,-715.35 D17.2@2793.11,-715.35
  Top Layer w19.68: R39.2@1266.34,-80.71 R50.1@1331.3,-80.71 ; R39.2@1267.13,-79.92 R50.1@1320.67,-79.92
  Bottom Layer w10: v1@1212.01,-277.56 v1(1212.01,-279.53) 1212.01,-334.25 1204.53,-341.73 1125,-341.73 1106.1,-322.83 1106.1,-225.2 1143.11,-188.19 1266.73,-188.19 1295.08,-159.84 1295.08,-77.56 1310.83,-61.81 2159.25,-61.81 2225.39,-127.95 pad.6@2228.94,-127.95
  other v1: 1298.23,-72.44
CJFS-D: P10.6 R86.1 | length 150.3
  Top Layer w10: P10.6@566.93,-1184.25 566.93,-1111.61 582.32,-1096.22 R86.1@582.32,-1040.35
  other v1: 543.9,-1203.15 574.61,-1203.15
CJFSKZ: pad.3 pad.5 R53.1 U5.4 U13.2 | length 2572.9
  Top Layer w10: U13.2@933.98,-482.6 933.98,-451.26 pad.3@980.91,-404.33 ; pad.5@2251.77,-81.89 2439.17,-81.89 2455.71,-98.43 2455.71,-450 2471.06,-465.35 2610.83,-465.35 U5.4@2678.94,-533.46
  Bottom Layer w10: pad.3@980.91,-404.33 956.5,-379.92 956.5,-99.21 968.7,-87.01 1013.19,-87.01 1058.23,-41.97 2192.95,-41.97 2242.32,-91.34 pad.5@2252.17,-91.34
CJNTC: P7.27 R84.1 R90.2 | length 262.9
  Top Layer w10: R90.2@2809.65,-981.5 2818.31,-981.5 2878.94,-1042.13 R84.1@2883.66,-1042.13 2883.66,-1162.2 P7.27@2872.83,-1173.03
  Bottom Layer w10: P7.27@2872.83,-1173.03 P7.27@2892.91,-1152.95
  other v1: 2859.65,-1201.97 2889.57,-1202.36
CS+: D14.3 P7.14 | length 114.5
  Top Layer w10: P7.14@1572.83,-1173.03 1572.83,-1125 1599.89,-1097.94 D14.3@1599.89,-1069.72
  other v1: 1588.39,-1203.15 1559.65,-1200.79
CS-: D13.3 P7.15 | length 127
  Top Layer w10: P7.15@1672.83,-1173.03 1672.83,-1128.28 D13.3@1731,-1070.12
  other v1: 1687.99,-1203.15 1659.65,-1202.36
DGBH: R34.2 R37.2 U3.9 | length 1039.1
  Top Layer w10: R37.2@1733.27,-573.62 1733.66,-573.23 R34.2@1733.66,-498.82 ; 1013.98,-551.57 v1(1013.98,-533.86) 1013.98,-537.28 U3.9@1043.9,-567.2 1029.6,-567.2 1013.98,-551.57
  Bottom Layer w10: v1(1013.98,-533.86) 1017.13,-533.86 1017.13,-531.5 1134.05,-414.57 1414.76,-414.57 1571.06,-570.87 1724.61,-570.87 1732.09,-563.39 v1(1732.09,-535.83)
FB: C30.1 pad.30 R32.1 R45.1 R47.1 R57.2 R60.1 R63.1 U3.6 | length 2146.5
  Top Layer w10: R60.1@1066.93,-211.22 R60.1@1063.39,-211.22 1067.72,-211.22 1098.23,-180.71 1172.24,-180.71 1202.36,-210.83 C30.1@1206.69,-210.83 1206.69,-226.18 1143.9,-288.98 U3.6@1143.9,-333.2 U3.6@1144.29,-333.59 ; v1(1633.27,-499.21) v1(1660.04,-499.21) 1654.13,-505.12 R47.1@1654.13,-540.95 ; 1644.68,-588.98 1644.68,-600.39 1645.47,-601.18 R45.1@1645.47,-675.98 ; R57.2@1645.47,-614.17 1655.31,-604.33 R47.1@1655.31,-540.95 ; R63.1@2084.84,-73.23 2139.17,-73.23 2174.61,-108.66 2174.61,-222.05 R32.1@2176.57,-224.02
  Bottom Layer w10: v1@1155.32,-277.56 v1@1170.28,-262.6 ; v1(1171.85,-260.63) 1192.72,-239.76 2117.91,-239.76 pad.30@2176.57,-181.1 ; 1569.88,-241.73 1569.88,-435.83 1635.24,-501.18 v1@1659.25,-501.18
  other v1: 1154.53,-279.53
GND: C31.1 C33.1 C34.2 C38.2 P10.4 Q5.S Q6.S R58.2 R81.1 R92.1 U6.2 ZD4.1 | length 3230.2
  Top Layer w10: R58.2@93.7,-449.02 98.82,-449.02 154.33,-393.5 C31.1@154.33,-366.34 C34.2@247.24,-366.34 ; C33.1@100.79,-261.61 108.86,-253.54 206.5,-253.54 213.39,-260.43 U6.2@213.39,-294.88 213.39,-354.92 201.97,-366.34 C34.2@247.24,-366.34 ; 177.95,-528.54 ZD4.1@177.95,-493.9 ; v1@252.56,-582.28 251.77,-581.5 136.42,-581.5 177.95,-539.96 ZD4.1@177.95,-493.9 ; Q5.S@309.37,-882.48 372.05,-882.48 372.05,-804.57 C38.2@370.67,-803.19 ; C38.2@372.05,-811.42 383.46,-822.83 v1(507.28,-822.83) ; v1@495.87,-894.09 495.87,-857.39 506.89,-868.41 Q6.S@506.89,-855.59 506.89,-795.28 R92.1@514.57,-787.6 ; ZD4.1@177.95,-493.9 177.95,-451.38 C34.2@255.12,-374.21 C34.2@247.24,-366.34
  Bottom Layer w10: v1@252.56,-582.28 252.56,-488.98 439.17,-302.36 567.13,-302.36 590.75,-325.98 590.75,-739.37 v1(507.28,-822.83) ; P10.4@359.06,-1173.23 359.06,-1103.54 ; v1(494.29,-892.91) 494.29,-835.83 v1(507.28,-822.83) ; v1@497.05,-892.52 436.42,-892.52 355.71,-973.23 355.71,-1079.53 359.06,-1082.87 359.06,-1103.54 ; 359.06,-1103.54 359.06,-850.59 386.81,-822.83 v1(507.28,-822.83)
  other v1: 374.61,-1203.15 344.68,-1202.76 441.93,-853.94 134.05,-582.28 249.8,-581.1 78.54,-298.03 489.17,-251.18 331.3,-155.51
GND2: C24.2 C25.2 C26.2 C27.2 C30.2 C32.2 C36.2 C39.2 C40.2 C41.2 C42.2 C43.2 C44.2 C45.2 C47.2 C52.2 D13.1 D14.1 P7.13 P7.20 P7.21 pad.2@1070.28,-416.14 pad.7 pad.8 pad.9 pad.10 pad.20 pad.25 pad.38 pad.40 pad.41 pad.42 pad.43 pad.44 Q4.S R31.1 R35.1 R37.1 R41.1 R48.2 R50.2 R51.2 R55.1 R57.1 R59.2 R61.1 R62.1 R72.1 R73.1 R80.1 R82.1 R83.2 R90.1 U3.10 U3.14 U5.2 U7.2 U8.2 U9.4 U11.2 U12.2 U14.2 | length 14236.4
  Top Layer w10: 935.95,-277.48 937.83,-275.59 pad.20@997.44,-275.59 ; pad.44@937.99,-990.55 938.39,-990.16 pad.40@1128.54,-990.16 1034.65,-896.26 U9.4@1034.65,-824.96 ; U9.4@1043.9,-815.71 U9.4@1034.65,-824.96 ; C39.2@1082.32,-1257.48 1082.32,-1254.96 1034.65,-1207.28 U9.4@1034.65,-824.96 ; U9.4@1093.9,-700.39 1149.41,-644.88 1293.9,-644.88 ; U3.10@1093.9,-567.2 1093.9,-765.71 U9.4@1034.65,-824.96 ; R59.2@1127.56,-74.21 1127.56,-142.72 R55.1@1135.43,-150.59 1135.83,-150.2 1346.06,-150.2 1394.68,-101.57 1394.68,-77.56 1399.02,-73.23 C25.2@1541.54,-73.23 ; v1(1284.45,-502.76) 1293.9,-512.2 U3.14@1293.9,-567.2 1293.9,-653.94 1444.68,-653.94 1484.25,-614.37 C26.2@1484.25,-565.39 ; R50.2@1395.87,-74.02 1395.87,-123.62 v1(1400.98,-128.74) ; P7.13@1472.83,-1173.03 1472.83,-1061.65 R48.2@1479.92,-1054.57 ; 1496.06,-765.55 1486.79,-774.82 U12.2@1255.76,-774.82 ; C41.2@1496.06,-729.72 1496.06,-749.22 ; C42.2@1498.82,-832.48 1496.06,-829.72 1496.06,-749.22 ; v1(1501.77,-335.43) 1525,-312.2 C24.2@1525,-285.83 1525,-328.35 v1(1531.69,-335.04) ; C24.2@1533.27,-285.04 R31.1@1533.27,-209.06 ; R57.1@1592.32,-612.6 1556.1,-612.6 1508.9,-565.39 C26.2@1484.25,-565.39 ; C32.2@1655.91,-909.65 1733.07,-909.65 R61.1@1733.46,-909.25 ; v1(1697.44,-613.39) 1718.31,-634.25 R37.1@1733.27,-634.25 ; v1@1697.64,-320.28 U7.2@1731.5,-320.28 ; 1706.1,-909.65 1708.03,-911.57 C36.2@1861.42,-911.57 1868.9,-904.09 R80.1@1868.9,-752.95 ; D13.1@1769,-990.12 1733.13,-1025.98 1661.61,-1025.98 1637.89,-1002.26 D14.1@1637.89,-989.72 1602.42,-1025.2 1509.29,-1025.2 R48.2@1479.92,-1054.57 ; C52.2@1810.43,-830.71 1810.83,-830.32 pad.38@1868.9,-830.32 ; U11.2@1946.65,-569.69 1979.72,-569.69 2000,-589.96 R62.1@2183.86,-589.96 ; R62.1@2183.86,-583.27 2247.91,-519.21 Q4.S@2250.59,-519.21 ; P7.21@2272.83,-1173.03 2272.83,-1224.21 2299.8,-1251.18 2447.44,-1251.18 2472.83,-1225.79 2472.83,-1173.03 2472.83,-1153.35 ; v1(2387.99,-727.95) 2406.5,-709.45 C45.2@2421.85,-709.45 ; v1(2399.8,-1074.02) 2425.79,-1048.03 R82.1@2425.79,-1042.13 ; v1(2537.2,-937.8) 2537.6,-937.4 U14.2@2537.6,-896.85 2537.6,-868.9 2562.01,-844.49 v1@2602.17,-844.49 ; C44.2@2577.36,-1043.31 2808.46,-1043.31 R90.1@2809.65,-1042.13 ; v1(2744.68,-853.94) 2752.56,-853.94 2774.61,-875.98 U8.2@2774.61,-900.39 ; v1(2763.58,-583.86) 2771.85,-575.59 U5.2@2807.28,-575.59 2839.96,-575.59 2864.37,-551.18 R73.1@2882.09,-551.18 ; U9.4@1034.65,-824.96 1084.78,-774.82 U12.2@1255.76,-774.82 ; U12.2@1255.76,-774.82 1255.76,-921.66 1370.47,-1036.38 R51.2@1370.47,-1054.57 R48.2@1479.92,-1054.57 ; C26.2@1484.25,-565.39 1484.25,-691.54 1496.06,-703.35 1496.06,-749.22
  Bottom Layer w10: pad.2@1070.28,-416.14 1113.58,-372.83 1493.9,-372.83 v1(1531.69,-335.04) ; pad.2@1075.79,-422.44 1075.79,-353.94 pad.20@997.44,-275.59 997.44,-245.67 v1(1127.76,-115.35) 1129.33,-113.78 1234.06,-113.78 1242.32,-122.05 v1(1242.32,-151.18) ; v1(1334.84,-653.94) v1(1426.97,-653.94) ; P7.13@1481.1,-1198.23 1481.1,-1291.54 1495.47,-1305.91 2141.93,-1305.91 2172.83,-1275 P7.20@2172.83,-1173.03 ; v1@1690.35,-330.32 1690.35,-322.05 1693.9,-318.5 2194.29,-318.5 2333.27,-457.48 2399.02,-457.48 2686.02,-170.47 ; v1(1697.44,-613.39) 1748.62,-613.39 1768.31,-593.7 1768.31,-321.65 ; v1@1700.59,-610.24 1689.96,-620.87 1460.04,-620.87 v1(1426.97,-653.94) ; pad.38@1866.24,-832.97 1789.17,-910.04 pad.25@1789.17,-913.78 ; 1986.42,-321.65 1986.42,-572.84 2004.13,-590.55 v1@2066.73,-590.55 ; v1@2144.29,-588.98 2149.41,-583.86 2362.01,-583.86 2421.46,-643.31 2450.59,-643.31 2510.04,-583.86 v1(2763.58,-583.86) 2786.02,-583.86 2821.85,-619.69 2821.85,-994.09 v1@2773.03,-1042.91 ; 2387.99,-931.1 v1(2387.99,-727.95) ; v1(2399.8,-1074.02) 2400.98,-1074.02 v1(2537.2,-937.8) ; 2429.53,-932.28 2406.48,-932.28 ; v1@2537.2,-937.01 v1(2537.2,-937.8) ; v1(2601.77,-842.91) 2700.59,-941.73 v1(2700.59,-1042.91) v1@2773.03,-1042.91 ; v1(2744.68,-853.94) 2744.68,-1014.57 v1@2773.03,-1042.91 ; v1(1426.97,-653.94) 1426.97,-724.02 1333.66,-817.32 1333.66,-891.73 1355.71,-913.78 pad.25@1789.17,-913.78 ; pad.25@1789.17,-913.78 1807.68,-932.28 2406.48,-932.28 ; 2406.48,-932.28 2531.69,-932.28 v1(2537.2,-937.8)
  other v1: 1457.28,-1201.97 1487.2,-1201.97 2158.46,-1202.76 2188.39,-1201.97 2260.04,-1202.36 2289.17,-1202.36 2458.46,-1201.97 2486.81,-1202.76 2773.43,-1043.31 1364.76,-653.94 1397.05,-653.54 2066.73,-588.98 2145.08,-588.98 1690.35,-324.41
IOUT: P7.22 R76.1 | length 210.3
  Top Layer w10: P7.22@2372.83,-1173.03 2372.83,-1148.62 2388.98,-1148.62 2441.93,-1095.67 2472.64,-1095.67 2502.17,-1066.14 R76.1@2502.17,-1043.7
  other v1: 2359.25,-1201.18 2388.78,-1201.18
JCCS-: P7.23
JDQQD: P10.5 R74.1 | length 174.5
  Top Layer w10: R74.1@356.73,-1041.14 356.73,-1064.41 459.06,-1166.73 P10.5@459.06,-1173.23
  other v1: 443.5,-1202.76 474.21,-1202.76
LLC-CS: C32.1 D12.1 R46.2 R61.2 | length 233.4
  Top Layer w10: D12.1@1667.91,-770.87 1655.91,-782.87 C32.1@1655.91,-849.02 1733.07,-849.02 R61.2@1733.46,-848.62 ; R61.2@1732.48,-847.64 R61.2@1733.46,-848.62 ; R46.2@1733.66,-777.56 1733.66,-848.43 R61.2@1733.46,-848.62
NetC24_1: C24.1 U3.1 | length 90.9
  Top Layer w10: U3.1@1393.9,-333.2 1401.31,-325.79 1427.95,-325.79 C24.1@1465.94,-287.8
NetC25_1: C25.1 R35.2 U3.3 | length 367.2
  Top Layer w10: U3.3@1293.9,-333.2 1293.9,-305.12 1344.69,-254.33 1373.03,-254.33 1397.44,-229.92 1397.44,-185.43 1450.98,-131.89 C25.1@1535.24,-131.89
NetC28_2: C28.2 R56.2 R62.2 ZD3.1 | length 463
  Top Layer w10: C28.2@2307.87,-911.57 2305.87,-911.57 2251.38,-857.09 2251.38,-758.66 2190.16,-697.44 2190.16,-657.68 2255.12,-592.72 R56.2@2322.44,-592.72
NetC29_1: C29.1 R40.1 R65.1 | length 145.4
  Top Layer w10: R40.1@2090.35,-294.88 2090.35,-222.44 2090.75,-222.05 R65.1@2090.75,-149.61
NetC29_2: C29.2 C37.2 R65.2 R75.2 R80.2 U11.4 | length 1525.6
  Top Layer w10: U11.4@1828.54,-532.28 U11.4@1842.72,-532.28 ; U11.4@1839.96,-532.28 1902.17,-470.08 1902.17,-306.69 1926.57,-282.28 1961.61,-282.28 C29.2@2030.31,-213.58 ; U11.4@1841.93,-532.28 1878.15,-568.5 1878.15,-689.37 R80.2@1880.12,-691.34 2079.76,-691.34 C37.2@2085.43,-697.01 ; C29.2@2029.72,-222.44 C29.2@2030.12,-222.05 ; C29.2@2030.12,-222.83 R65.2@2030.12,-149.61
  Top Layer w19.68: R80.2@1873.03,-688.58 2078.94,-688.58 C37.2@2078.94,-699.21 ; R80.2@1875.39,-696.46 1969.88,-696.46 1970.28,-696.06 R75.2@1970.28,-692.91 ; 1917.52,-677.56 C37.2@2103.74,-677.56 ; 1943.9,-692.91 1952.95,-701.97 C37.2@2076.18,-701.97
NetC31_2: C31.2 R44.2 R49.2 R58.1 U6.1 | length 942.4
  Top Layer w10: R49.2@66.54,-737.36 66.54,-536.81 R58.1@93.7,-509.65 86.81,-516.54 42.72,-516.54 42.72,-384.65 ; R44.2@100.79,-89.57 72.44,-89.57 42.72,-119.29 42.72,-384.65 ; U6.1@175.98,-294.88 157.09,-313.78 126.57,-313.78 93.7,-346.65 C31.2@93.7,-366.34 61.02,-366.34 42.72,-384.65
NetC34_1: C34.1 R54.1 U6.3 ZD4.2 | length 267.2
  Top Layer w10: U6.3@250.79,-294.88 R54.1@315.16,-294.88 ; ZD4.2@307.87,-493.9 315.75,-486.02 R54.1@315.75,-294.29
NetC35_1: C35.1 D15.2 R34.1 U7.4 | length 331.1
  Top Layer w10: U7.4@1618.31,-287.01 U7.4@1630.91,-287.01 ; U7.4@1628.54,-281.1 1639.96,-269.69 C35.1@1639.96,-208.27 ; U7.4@1628.94,-282.68 1661.22,-314.96 1661.22,-420.47 D15.2@1678.94,-438.19 ; D15.2@1671.06,-443.31 1728.54,-443.31 R34.1@1733.66,-438.19
NetC35_2: C35.2 R64.1 U7.3 | length 211.6
  Top Layer w10: R64.1@1640.35,-122.84 1640.35,-132.28 1700.59,-192.52 1700.59,-255.91 1725.98,-281.3 U7.3@1743.7,-281.3
NetC37_1: C37.1 R70.2 | length 83.6
  Top Layer w10: C37.1@2085.43,-827.01 2085.43,-908.43 R70.2@2087.01,-910
NetC38_1: C38.1 D18.2 R79.1 Z1.2 | length 504.2
  Top Layer w10: Z1.2@255.31,-677.17 371.85,-677.17 413.98,-635.04 R79.1@413.98,-584.65 404.13,-574.8 D18.2@404.13,-311.02
NetC43_1: C43.1 R78.1 U11.3 | length 161.3
  Top Layer w10: U11.3@1946.65,-532.28 2027.56,-532.28 2027.56,-456.1 R78.1@2030.51,-453.15
NetC44_1: C44.1 R76.2 U14.3 | length 158.3
  Top Layer w10: R76.2@2502.17,-983.07 C44.1@2576.97,-983.07 ; C44.1@2575,-980.32 U14.3@2575,-896.85
NetD12_2: D12.2 R36.1 | length 79.9
  Top Layer w10: D12.2@1573.03,-773.23 1573.03,-848.43 R36.1@1576.38,-851.77
NetD13_2: D13.2 D14.2 R36.2 R48.1 R51.1 | length 471.1
  Top Layer w10: R51.1@1370.47,-924.57 1564.21,-924.57 R36.2@1576.38,-912.4 1562.89,-925.89 D14.2@1562.89,-989.72 1599.86,-952.76 1682.87,-952.76 1694,-963.88 D13.2@1694,-990.12
NetD15_1: D15.1 R47.2 | length 107.5
  Top Layer w10: R47.2@1586.81,-539.76 D15.1@1586.81,-432.28
NetD16_1: D16.1 Q5.D R74.2 | length 1028.4
  Top Layer w10: R74.2@230.08,-1041.34 230.08,-920.19 Q5.D@229.37,-919.48 231.3,-917.55 v1(231.3,-877.17) ; v1(512.8,-360.63) 519.88,-367.72 D16.1@563.98,-367.72
  Bottom Layer w10: v1(231.3,-877.17) 231.3,-740.16 263.58,-707.87 519.49,-707.87 545.47,-681.89 545.47,-393.7 515.55,-363.78 v1@515.55,-360.63
NetD16_2: D16.2 U4.2 | length 101.6
  Top Layer w10: D16.2@563.98,-273.23 563.98,-182.83 U4.2@571.93,-174.88
NetD17_1: D17.1 R30.2 U8.4 | length 192.3
  Top Layer w10: U8.4@2812.8,-787.8 2855.71,-787.8 R30.2@2887.6,-819.69 D17.1@2887.6,-715.35
NetD19_1: D19.1 R52.2 U14.4 | length 150.4
  Top Layer w10: U14.4@2575,-778.74 2575,-728.74 2555.31,-709.06 2616.73,-709.06 D19.1@2624.61,-716.93
NetQ3_1: Q3.1 R32.2 | length 156.5
  Top Layer w10: R32.2@2176.57,-284.65 2189.57,-284.65 2258.03,-216.18 Q3.1@2291.15,-216.18 Q3.1@2281.54,-225.79
NetQ3_2: Q3.2 R33.1 R42.2 | length 178.9
  Top Layer w10: Q3.2@2253.15,-296.18 2253.15,-352.95 R42.2@2241.34,-364.76 2300,-423.43 R33.1@2322.44,-423.43
NetQ4_D: Q4.D R42.1 | length 88.1
  Top Layer w10: R42.1@2180.71,-364.76 2180.71,-406.33 Q4.D@2213.59,-439.21
NetQ4_G: Q4.G R56.1 | length 188.3
  Top Layer w10: Q4.G@2175.59,-519.21 2175.59,-513.98 2206.1,-483.46 2279.72,-483.46 2322.44,-526.18 R56.1@2322.44,-532.09
NetQ5_G: Q5.G R81.2 Z1.1 | length 241.8
  Top Layer w10: Z1.1@255.31,-807.09 275,-826.77 275,-922.83 309.37,-957.21 Q5.G@309.37,-957.48 323.15,-943.7 R81.2@372.64,-943.7
NetQ6_D: Q6.D R86.2 | length 150.6
  Top Layer w10: R86.2@452.32,-1040.35 452.32,-1013.62 530.35,-935.59 Q6.D@543.89,-935.59
NetQ6_G: Q6.G R91.1 R92.2 | length 151.2
  Top Layer w10: R91.1@574.8,-707.28 574.8,-848.5 Q6.G@581.89,-855.59
NetR30_1: R30.1 R67.1 R72.2 U8.1 | length 432
  Top Layer w10: R72.2@2663.58,-982.28 2664.76,-981.1 R67.1@2664.76,-887.8 2682.87,-905.91 U8.1@2737.99,-905.91 ; R67.1@2677.76,-878.35 2681.69,-878.35 2736.81,-823.23 2809.65,-823.23 2866.73,-880.32 R30.1@2887.6,-880.32
NetR31_2: R31.2 U3.2 | length 193.7
  Top Layer w10: U3.2@1343.9,-333.2 1343.9,-303.15 1370.91,-276.14 1392.56,-276.14 R31.2@1465.94,-202.76
NetR38_2: R38.2 R49.1 | length 83.2
  Top Layer w10: R38.2@66.14,-950.35 66.54,-949.96 R49.1@66.54,-867.36
NetR39_1: R39.1 U4.3 | length 382.9
  Top Layer w10: U4.3@938.07,-174.88 954.45,-174.88 1010.83,-118.5 1010.83,-54.72 1036.02,-29.53 1162.01,-29.53 1202.36,-69.88 R39.1@1202.36,-74.21
NetR40_2: R40.2 U10.2 U11.1 | length 363.3
  Top Layer w10: U11.1@1946.65,-607.09 1921.06,-607.09 1908.46,-594.49 1908.46,-504.72 1951.77,-461.42 1951.77,-392.52 U10.2@1954.53,-389.76 ; U10.2@1953.15,-341.93 2000.2,-294.88 R40.2@2029.72,-294.88
NetR41_2: R41.2 U3.4 | length 184.3
  Top Layer w10: U3.4@1243.9,-333.2 1243.9,-286.61 1276.57,-253.94 1304.92,-253.94 1347.64,-211.22 R41.2@1350.39,-211.22
NetR43_1: R43.1 U4.1 | length 253.5
  Top Layer w10: R43.1@324.8,-90.35 556.46,-90.35 U4.1@571.93,-74.88
NetR43_2: R43.2 R44.1 U6.4 | length 195
  Top Layer w10: R44.1@161.42,-89.57 263.39,-89.57 264.17,-90.35 264.17,-127.36 250.79,-140.75 U6.4@250.79,-176.77
NetR46_1: R46.1 U7.1 | length 398.7
  Top Layer w10: R46.1@1733.66,-716.93 1781.69,-668.9 1781.69,-416.14 1734.84,-369.29 U7.1@1734.84,-357.48
NetR52_1: R52.1 R71.1 R82.2 U14.1 | length 368.9
  Top Layer w10: R82.2@2424.21,-979.92 R71.1@2424.21,-909.84 2487.2,-909.84 U14.1@2500.2,-896.85 2500.2,-850.39 2537.2,-813.39 2537.2,-751.97 2500.59,-715.35 R52.1@2500.59,-709.84
NetR53_2: R53.2 R68.1 R73.2 U5.1 | length 465.7
  Top Layer w10: R68.1@2619.88,-553.94 2630.51,-553.94 2652.95,-576.38 2732.48,-576.38 ; R53.2@2684.84,-466.93 2734.45,-516.54 2734.45,-603.54 2743.9,-612.99 U5.1@2792.32,-612.99 ; 2757.68,-612.99 U5.1@2807.28,-612.99 2880.91,-612.99 R73.2@2882.09,-611.81
NetR55_2: R55.2 U3.7 | length 139.2
  Top Layer w10: U3.7@1093.9,-333.2 1093.9,-281.1 1135.43,-239.57 R55.2@1135.43,-211.22
NetR59_1: R59.1 R60.2 U3.8 | length 295
  Top Layer w10: U3.8@1043.9,-333.2 1043.9,-260.24 1018.31,-234.65 1018.31,-186.61 1057.87,-147.05 1066.93,-147.05 R59.1@1066.93,-74.21
NetR63_2: R63.2 U10.3 | length 82.3
  Top Layer w10: U10.3@1941.93,-77.56 R63.2@2024.21,-77.56
NetR66_2: R66.2 U10.1 | length 258
  Top Layer w10: R66.2@1775.79,-147.24 1796.65,-147.24 1852.56,-203.15 1852.56,-357.87 U10.1@1850.2,-360.24
NetR69_2: R69.2 R75.1 | length 83.3
  Top Layer w10: R75.1@1975.98,-827.8 1977.56,-829.37 R69.2@1977.56,-910.39
NetR88_2: pad.4 pad.17 R88.2 U13.1 | length 2643.8
  Top Layer w10: U13.1@933.98,-582.6 933.98,-588.5 pad.17@982.48,-637.01 ; pad.4@2317.52,-120.08 2415.94,-120.08 2428.94,-133.07 2428.94,-486.22 R88.2@2466.73,-524.02
  Bottom Layer w10: pad.17@982.48,-637.01 982.48,-635.43 978.54,-635.43 929.33,-586.22 929.33,-84.65 949.41,-64.57 1001.38,-64.57 1043.9,-22.05 2253.35,-22.05 2311.22,-79.92 pad.4@2311.22,-117.32
NetR91_2: R91.2 U13.3 | length 384.1
  Top Layer w10: R91.2@508.46,-702.36 453.35,-702.36 444.29,-693.31 444.29,-513.39 457.68,-500 550.43,-500 U13.3@567.83,-482.6
NetZD1_1: ZD1.1 ZD2.2 | length 104.9
  Top Layer w10: ZD2.2@2188.98,-810.04 2188.98,-900.98 ZD1.1@2198.82,-910.83
NetZD2_1: ZD2.1 ZD3.2 | length 113.1
  Top Layer w10: ZD2.1@2318.9,-810.04 2318.9,-698.62 ZD3.2@2320.08,-697.44
NTC-ADC: C47.1 R84.2 U5.3 U8.3 | length 815.2
  Top Layer w10: C47.1@2736.81,-981.89 2737.6,-981.89 2777.36,-942.13 2844.29,-942.13 R84.2@2883.66,-981.5 2882.87,-980.71 2882.87,-973.62 v1@2914.37,-942.13 ; v1(2804.53,-506.69) 2807.28,-509.45 U5.3@2807.28,-538.19 ; 2812.8,-940.55 U8.3@2812.8,-905.91
  Bottom Layer w10: v1(2804.53,-506.69) 2865.16,-506.69 2906.5,-548.03 2906.5,-931.1 2913.19,-937.8 v1@2910.43,-940.55
  other v1: 2912.01,-941.73
QA: P7.16 pad.15 U3.15 | length 1204.7
  Top Layer w10: U3.15@1343.9,-567.2 pad.15@1343.9,-507.48
  Bottom Layer w10: pad.15@1341.54,-506.3 1341.54,-538.98 1270.28,-610.24 1270.28,-1051.57 1306.5,-1087.8 1717.13,-1087.8 1772.83,-1143.5 P7.16@1772.83,-1173.03
  other v1: 1758.86,-1202.76 1789.17,-1202.76
QB: P7.17 pad.16 U3.11 | length 1575.8
  Top Layer w10: pad.16@1143.11,-506.3 1143.9,-507.09 U3.11@1143.9,-567.2
  Bottom Layer w10: pad.16@1143.11,-506.3 pad.16@1147.83,-511.02 ; pad.16@1148.23,-499.21 1185.24,-462.2 1375,-462.2 1391.14,-478.35 1391.14,-531.89 1296.65,-626.38 1296.65,-1031.1 1323.03,-1057.48 1764.37,-1057.48 1852.36,-1145.47 1872.83,-1145.47 P7.17@1872.83,-1173.03
  other v1: 1858.46,-1203.15 1887.99,-1202.76